# Altium PCB Battery.PcbDoc
Units mm, origin at the board's own origin, x right, y up, seen from the top; angles counter-clockwise.
Board outline 150.25 x 74.25 mm, 2 copper layers (Top Layer, Bottom Layer); 20 components, 18 nets, 75 pads, 128 vias.
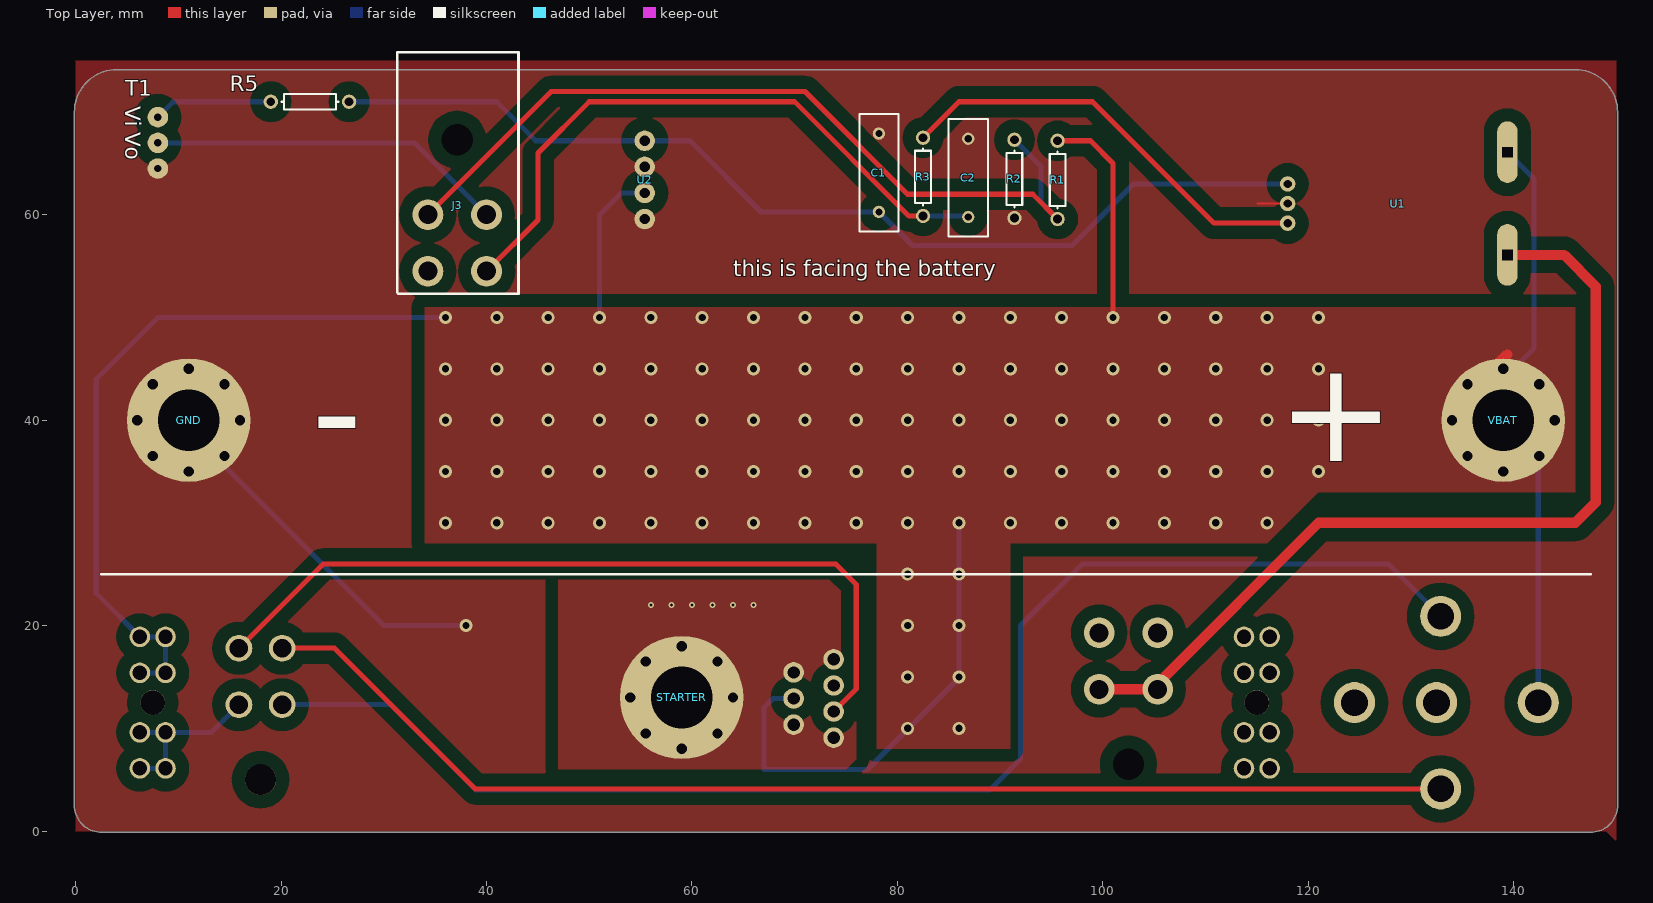
[diagram p0: Top Layer view]
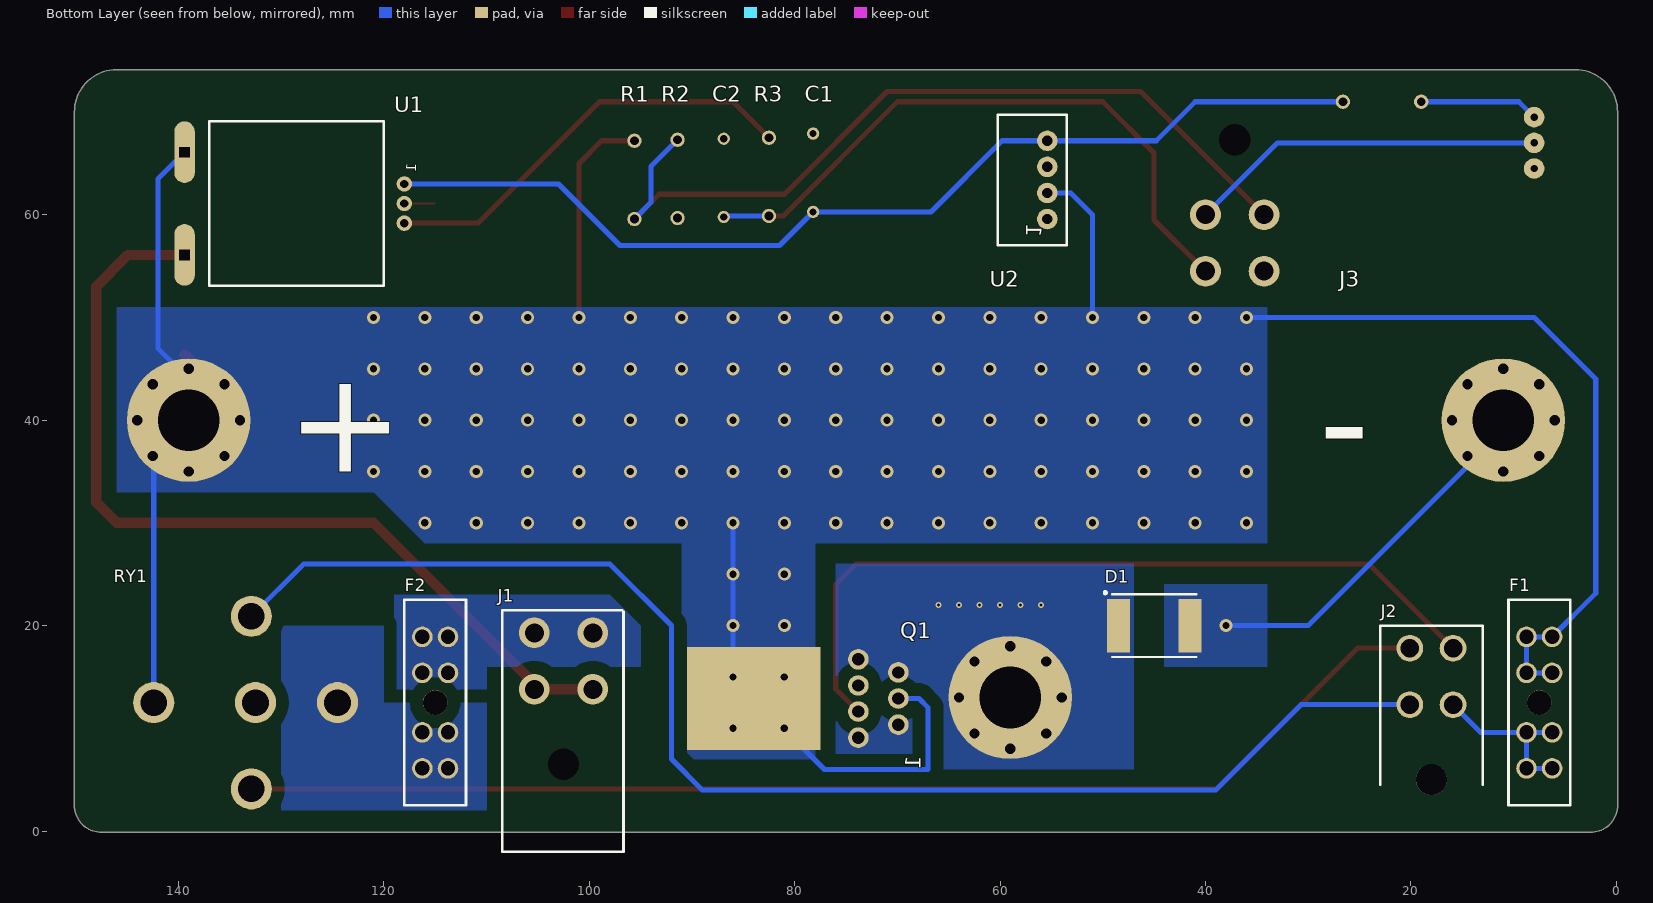
[diagram p1: Bottom Layer view, seen from below]

## Layer stack, top to bottom
Top Solder: solder mask 0.0102, Solder Resist, Dk 3.5
Top Layer: signal copper 0.0356
Dielectric 1: dielectric 0.32, FR-4, Dk 4.8
Bottom Layer: signal copper 0.0356
Bottom Solder: solder mask 0.0102, Solder Resist, Dk 3.5

## Board outline
2.5,-0.127 cw(c2.5,2.5) -0.127,2.5 cw(c0,2.5) -0.127,2.502 -0.127,70 cw(c4,70) 4,74.127 145.5,74.127 cw(c145.5,74) 145.502,74.127 146,74.127 cw(c146,70) 150.127,70 150.127,55 cw(c150,55) 150.127,54.998 150.127,2.5 ccw(c150,2.5) 150.127,2.502 150.127,2.5 cw(c147.5,2.5) 147.5,-0.127 cw(c147.5,0) 147.498,-0.127

## Design rules (kind name [scope] priority, off if disabled: settings)
Clearance "Copper Pour" [All vs inPolygon] p1: gap=1.27 ignorepadtopadclearanceinfootprint=FALSE
HoleSize [All] p1: absolutevalues=TRUE maxlimit=6.3 minlimit=0.3 maxpercent=80.000 minpercent=20.000
PolygonConnect [All] p1: connectstyle=Direct reliefconductorwidth=0.254 reliefentries=4 polygonreliefangle="90 Angle" airgapwidth=0.254
RoutingVias [All] p1: holewidth=0.711 width=1.27 viastyle="Through Hole" minholewidth=0.5 minwidth=0.5 maxholewidth=0.711 maxwidth=1.27
SolderMaskExpansion [All] p1: expansion=0.102
Width [All] p1: maxlimit=5 minlimit=0.2 preferedwidth=0.5
29 further rules are at their usual default settings.

## Components (designator, comment, footprint, x,y, rotation, side; value= is the part's Value field where it differs from the comment)
C1 "Cap" RAD-0.3 78.2,64.09 r90 top value=0.1uF
C2 "Cap" RAD-0.3 86.9,63.59 r90 top value=?
D1 "SK106" DIOM8060X54N 45,20 r180 bottom
F1 "Fuse" FUSE 7.5,12.5 r270 bottom
F2 "Fuse" FUSE 115,12.5 r90 bottom
GND "M5" MH-M5#1 10,40 r0 top locked
J1 "76825-0004" 76825-0004 102.5,6.5 r180 bottom
J2 "39-30-1040" 39-30-1040 18,5 r180 bottom
J3 "76825-0004" 76825-0004 37.15,67.3 r180 top
Q1 "BTS50085" BTS50085 73.8,12.9 r270 top
R1 "" AXIAL-0.3 95.6,63.39 r90 top
R2 "" AXIAL-0.3 91.4,63.49 r90 top value=100K
R3 "" AXIAL-0.3 82.5,63.69 r90 top
R5 "Res1" AXIAL-0.3 22.81,71 r0 top value=1K
RY1 "Relay" RELAY 124.5,12.5 r0 bottom
STARTER "M5" MH-M5#2 59,13 r0 top
T1 "MCP9700/9700A" TEMPSENSOR 8,67 r270 top
U1 "ACS770" ACS770 118,61.09 r270 top
U2 "ROE-0505S" ROE-0505S 55.4,59.58 r90 top
VBAT "M5" MH-M5#3 140,40 r0 top locked

## Footprints (in the part's own frame and the unit in brackets; to place one, negate y for a bottom-side part, rotate by r counter-clockwise, add the part's x,y. Pads: shape width x height; smd on the part's side, far side on the other; paste and mask are expansions set on the pad)
39-30-1040 [mm]
  round 2.6 hole 1.8: 1(2.1,7.3) 2(-2.1,7.3) 3(2.1,12.8) 4(-2.1,12.8)
  round 3 hole 3: MH(0,0)
  silkscreen extent -5,-0.5 5,15, body extent -4.8,-6.57 5.2,13.37, height 11.4
76825-0004 [mm] "Molex Connector"
  round 3 hole 1.85: 1(-2.85,7.3) 2(-2.85,12.8) 3(2.85,7.3) 4(2.85,12.8)
  round 0 hole 3.05: 22(0,0)
  silkscreen extent -5.97,-8.51 5.84,14.99
ACS770 [mm] "Thru Hole Current Sensor"
  round 1.5 hole 0.8: 1(-1.91,0) 2(0,0) 3(1.91,0)
  oval 6x2 hole 1 square: 4(-5,21.4) 5(5,21.4)
AXIAL-0.3 [mm] "Axial Device, Thru-Hole; 2 Leads; 0.3 in Pin Spacing"
  round 1.4 hole 0.85: 1(-3.81,0) 2(3.81,0)
  silkscreen extent -2.77,-0.76 2.77,0.76
BTS50085 [mm] "Highside High Current Power Switch"
  round 2 hole 1.2: 1(3.81,0) 2(2.54,-3.9) 3(1.27,0) 4(0,-3.9) 5(-1.27,0)
  round 2 hole 1.2 paste+0: 6(-2.54,-3.9) 7(-3.81,0)
  rect 10x13 smd far side: TAB(0,10.2)
DIOM8060X54N [mm] "Molded Diode, 2-Leads, Body 8.01x6.02mm, IPC Medium Density"
  rect 2.25x5.2 smd: 1(-3.475,0) 2(3.475,0)
  silkscreen extent -4.88,-3.05 4.1,3.32, body extent -4.31,-3.05 4.31,3.05, height 5.43
FUSE [mm]
  round 2 hole 1.4: 1(-6.4,-1.25) 1(-6.4,1.25) 1(-2.9,-1.25) 1(-2.9,1.25) 2(2.9,-1.25) 2(2.9,1.25) 2(6.4,-1.25) 2(6.4,1.25)
  round 2.4 hole 2.4 unplated: MH(0,0)
  silkscreen extent -10,-3 10,3, body extent -10,-3 10,3, height 17.5
MH-M5#1 [mm]
  round 12 hole 6: 1(1,0)
MH-M5#2 [mm]
  round 12 hole 6: 1(0,0)
MH-M5#3 [mm]
  round 12 hole 6: 1(-1,0)
RAD-0.3 [mm] "Radial Cap, Thru-Hole; 2 Leads; 0.3 in Pin Spacing"
  round 1.2 hole 0.7: 1(-3.81,0) 2(3.81,0)
  silkscreen extent -5.71,-1.91 5.72,1.9
RELAY [mm]
  round 4 hole 2.6: 30(17.9,0) 85(8.4,-8.4) 86(8.4,8.4) 87(0,0) 87a(8,0)
  body extent -4,-11 22,11, height 25
ROE-0505S [mm] "12-5V DCDC Converter"
  round 2 hole 1: 1(0,0) 2(2.54,0) 3(5.08,0) 4(7.62,0)
TEMPSENSOR [mm]
  round 2 hole 0.7: 1(-2.5,0) 2(0,0) 3(2.5,0)

## Part data
C1 C2: "Capacitor", LatestRevisionDate=17-Jul-2002, LatestRevisionNote="Re-released for DXP Platform.", PackageDescription="Radial Cap, Thru-Hole; 2 Leads; 0.3 in Pin Spacing", PackageReference=RAD-0.3, Published=8-Jun-2000, Publisher="Altium Limited"
GND STARTER VBAT: library part MH-M5, "M5 mounting hole"
J3: "J3"
R1 R2 R3: library part Res1, "Resistor", LatestRevisionDate=17-Jul-2002, LatestRevisionNote="Re-released for DXP Platform.", PackageDescription="Axial Device, Thru-Hole; 2 Leads; 0.3 in Pin Spacing", PackageReference=AXIAL-0.3, Published=8-Jun-2000, Publisher="Altium Limited"
  R1 R3: R1=300K
R5: "Resistor", LatestRevisionDate=17-Jul-2002, LatestRevisionNote="Re-released for DXP Platform.", PackageDescription="Axial Device, Thru-Hole; 2 Leads; 0.3 in Pin Spacing", PackageReference=AXIAL-0.3, Published=8-Jun-2000, Publisher="Altium Limited"
T1: "Temp Sensor"

## Via types
v1: diameter 1.27, hole 0.711, Top Layer to Bottom Layer, 98 vias
v2: diameter 1, hole 1, Top Layer to Bottom Layer, 24 vias
v3: diameter 0.6, hole 0.3, Top Layer to Bottom Layer, tented both sides, 6 vias

## Nets (pads, with @x,y where several pads share a name; then routed paths per layer and width w, separated by ;. In a path a pad name is that pad's centre, name@x,y a point inside that pad or via, vN(x,y) a via of type N, cw(c..) or ccw(c..) an arc to the next point about the centre after c; other vN are vias at no path point)
+5V: C1.1 R5.2 U1.1 U2.4 | length 99.7
  Bottom Layer w0.5: R5.2 41,71 44.8,67.2 U2.4 59.8,67.2 66.72,60.28 C1.1 81.48,57 97,57 103,63 U1.1
+VBAT: F1.1 Q1.4 Q1.TAB R1.2 RY1.30 U1.4 U2.2 VBAT.1 | length 211.1
  Top Layer w0.5: R1.2 98.8,67.2 101,65 v1(101,50)
  Top Layer w1: VBAT.1@136.5,43.5 139.4,46.4
  Bottom Layer w0.5: F1.1@6.25,15.4 8.75,15.4 8.75,18.9 6.25,18.9 2,23.15 2,44 8,50 v1(36,50) ; v1(51,50) 51,60 53.12,62.12 U2.2 ; Q1.4 67.9,12.9 67,12 67,6 77.1,6 Q1.TAB 86,14.9 v1(86,30) ; U1.4 142,63.49 142,47 VBAT.1@140,45 ; VBAT.1@140,40 142.4,37.6 RY1.30
  other v1: 81,10 86,10 81,15 86,15 81,20 86,20 81,25 86,25 36,30 41,30 46,30 51,30 56,30 61,30 66,30 71,30 76,30 81,30 91,30 96,30 101,30 106,30 111,30 116,30 36,35 41,35 46,35 51,35 56,35 61,35 66,35 71,35 76,35 81,35 86,35 91,35 96,35 101,35 106,35 111,35 116,35 121,35 36,40 41,40 46,40 51,40 56,40 61,40 66,40 71,40 76,40 81,40 86,40 91,40 96,40 101,40 106,40 111,40 116,40 121,40 36,45 41,45 46,45 51,45 56,45 61,45 66,45 71,45 76,45 81,45 86,45 91,45 96,45 101,45 106,45 111,45 116,45 121,45 41,50 46,50 56,50 61,50 66,50 71,50 76,50 81,50 86,50 91,50 96,50 106,50 111,50 116,50 121,50
  other v2: 139,35 135.5,36.5 142.5,36.5 134,40 144,40 135.5,43.5 142.5,43.5 139,45
+VBAT_ON: F1.2 J2.1 | length 16.8
  Bottom Layer w0.5: F1.2@6.25,6.1 8.75,6.1 F1.2@8.75,9.6 ; F1.2@6.25,9.6 F1.2@8.75,9.6 ; J2.1 13.2,9.6 F1.2@8.75,9.6
+VBAT_PROT: F2.2 J1.2 J1.4
+VBAT_SW: F2.1 RY1.87
GND: C1.2 C2.2 D1.2 GND.1 R2.1 T1.3 U1.2 U2.1 U2.3 | length 34.4
  Top Layer w0.2: 115.09,61.09 U1.2
  Bottom Layer w0: U1.2@117.91,61 U1.2
  Bottom Layer w0.5: GND.1@13.5,36.5 30,20 v1(38,20)
  other v2: 11,35 7.5,36.5 14.5,36.5 6,40 16,40 7.5,43.5 14.5,43.5 11,45
GND_SW: J2.4 RY1.86 | length 118.5
  Top Layer w0.5: J2.4 25.2,17.8 38.9,4.1 RY1.86
NetC2_1: C2.1 J3.2 R3.1 | length 62.3
  Top Layer w0.5: J3.2 45,59.5 45,66 50,71 70,71 81.12,59.88 R3.1
  Bottom Layer w0.5: R3.1@82.6,59.78 R3.1 86.8,59.88 C2.1
NetGND_1: 
NetJ1_1: J1.1 J1.3 U1.5 | length 87.1
  Top Layer w0.5: J1.1 J1.1@105.35,14.35
  Top Layer w1: J1.3 J1.1 ; J1.1@105.35,14.35 121,30 146,30 148,32 148,53 144.91,56.09 U1.5
NetJ3_1: J3.1 T1.2 | length 35.2
  Bottom Layer w0.5: T1.2@8,67.7 8.7,67 33,67 J3.1
NetJ3_3: J3.3 R1.1 R2.2 | length 80.9
  Top Layer w0.5: J3.3 46.3,72 71,72 81,62 93.18,62 R1.1
  Bottom Layer w0.5: R2.2 94,64.7 94,61.18 R1.1
NetR1_2: 
NetR3_2: R3.2 U1.3 | length 41.8
  Top Layer w0.5: R3.2 86,71 99,71 110.82,59.18 U1.3
NetR5_1: R5.1 T1.1 | length 11.6
  Bottom Layer w0.5: T1.1 9.5,71 R5.1
ON: J2.2 RY1.85 | length 135.1
  Bottom Layer w0.5: J2.2 30.7,12.3 39,4 89,4 92,7 92,20 98,26 127.8,26 RY1.85
START: J2.3 Q1.3 | length 77.6
  Top Layer w0.5: J2.3 24.1,26 74,26 76,24 76,13.83 Q1.3
STARTER: D1.1 Q1.1 Q1.2 Q1.6 Q1.7 STARTER.1
  other v2: 59,8 55.5,9.5 62.5,9.5 54,13 64,13 55.5,16.5 62.5,16.5 59,18
  other v3: 56,22 58,22 60,22 62,22 64,22 66,22
pads on no net: F1.MH F2.MH J1.22 J2.MH J3.4 J3.22 Q1.5 RY1.87a

## Polygon pours and split planes (outlines as drawn)
+VBAT_SW on Bottom Layer "+VBAT_SW_L02_P010" (solid, pour order 10): 130,20 120,20 120,12.5 110,12.5 110,2 130,2
+VBAT_PROT on Bottom Layer "+VBAT_PROT_L02_P056" (solid, pour order 56): 119,23 98,23 95,20 95,16 110,16 110,13 119,13
GND on Bottom Layer "GND_L02_P070" (solid, pour order 70): 44,24 34,24 34,16 44,16
+VBAT on Bottom Layer "+VBAT_L02_P074" (solid, pour order 74): 146,51 34,51 34,28 78,28 78,7 91,7 91,28 116,28 121,33 146,33
STARTER on Bottom Layer "STARTER_L02_P054" (solid, pour order 54): 47,26 47,6 76,6 76,26
+VBAT on Top Layer "+VBAT_L01_P066" (solid, pour order 66): 146,51 34,51 34,28 78,28 78,8 91,8 91,28 116,28 121,33 146,33
STARTER on Top Layer "Bottom Layer-No Net" (solid, pour order 78): 47,26 47,6 75,6 76,7 76,26
GND on Top Layer "Bottom Layer-No Net" (solid, pour order 80): 0,75 150,75 150,-1 149,0 0,0

## Silkscreen, mask and mechanical layers (free items; w line width, h text height)
Top Overlay:
  lines w0.254: 2.5,25 147.5,25
  text "this is facing the battery" at 64,54 h1.52
  text "-" at 23,36 h10
  text "+" at 117,36 h10
Bottom Overlay:
  text "-" at 24,35 h10
  text "+" at 118,35 h10
Mechanical 1:
  lines w0.254: 145,74 146,74 cw(c146,70) 150,70 150,55 150,2.5 cw(c147.5,2.5) 147.5,0 2.5,0 cw(c2.5,2.5) 0,2.5 0,70 cw(c4,70) 4,74 145.5,74

## Text inside footprints (layer, text, board x,y; h text height)
Q1: Bottom Overlay "1" at 67.704,7.312 h1.52 r270
T1: Top Overlay "Vi" at 4.825,70.556 h1.52 r270; Top Overlay "Vo" at 4.825,68.016 h1.52 r270
U1: Bottom Overlay "1" at 116.857,65.027 h1 r270
U2: Bottom Overlay "1" at 57.432,57.802 h1.52 r90